# Altium PCB PCB.PcbDoc
Units mm, origin at the board's own origin, x right, y up, seen from the top; angles counter-clockwise.
Board outline 35.91 x 21.8 mm, 2 copper layers (Top Layer, Bottom Layer), stack 1.57 mm thick; 37 components, 16 nets, 94 pads, 88 vias.
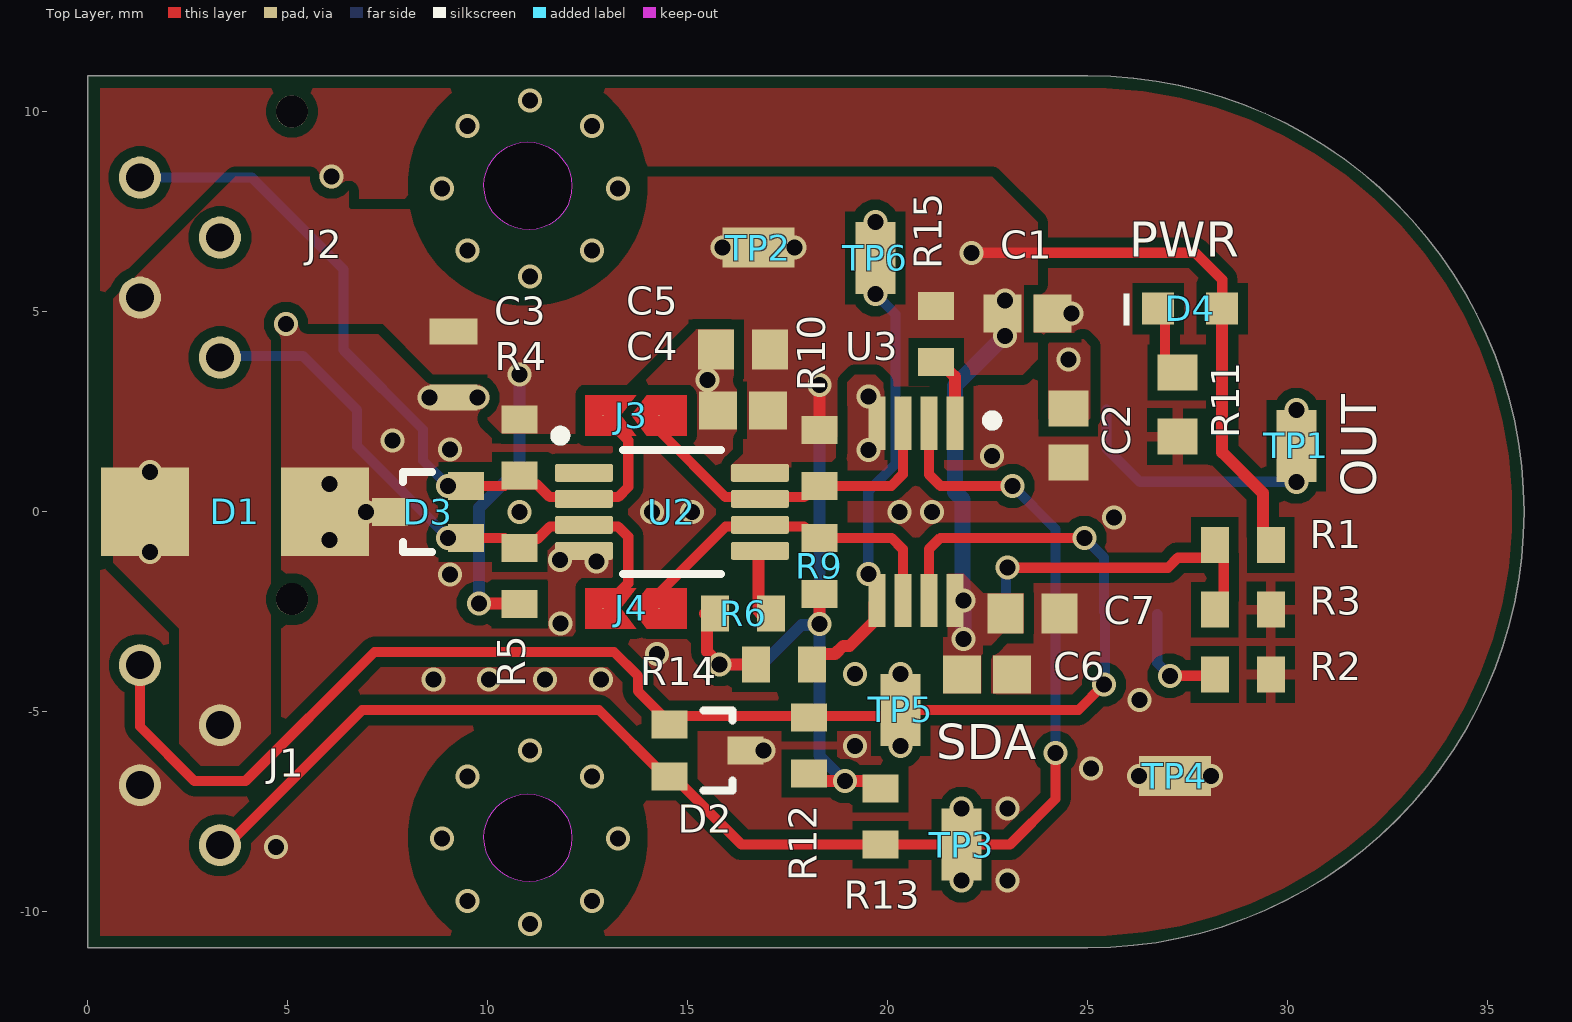
[diagram p0: Top Layer view]
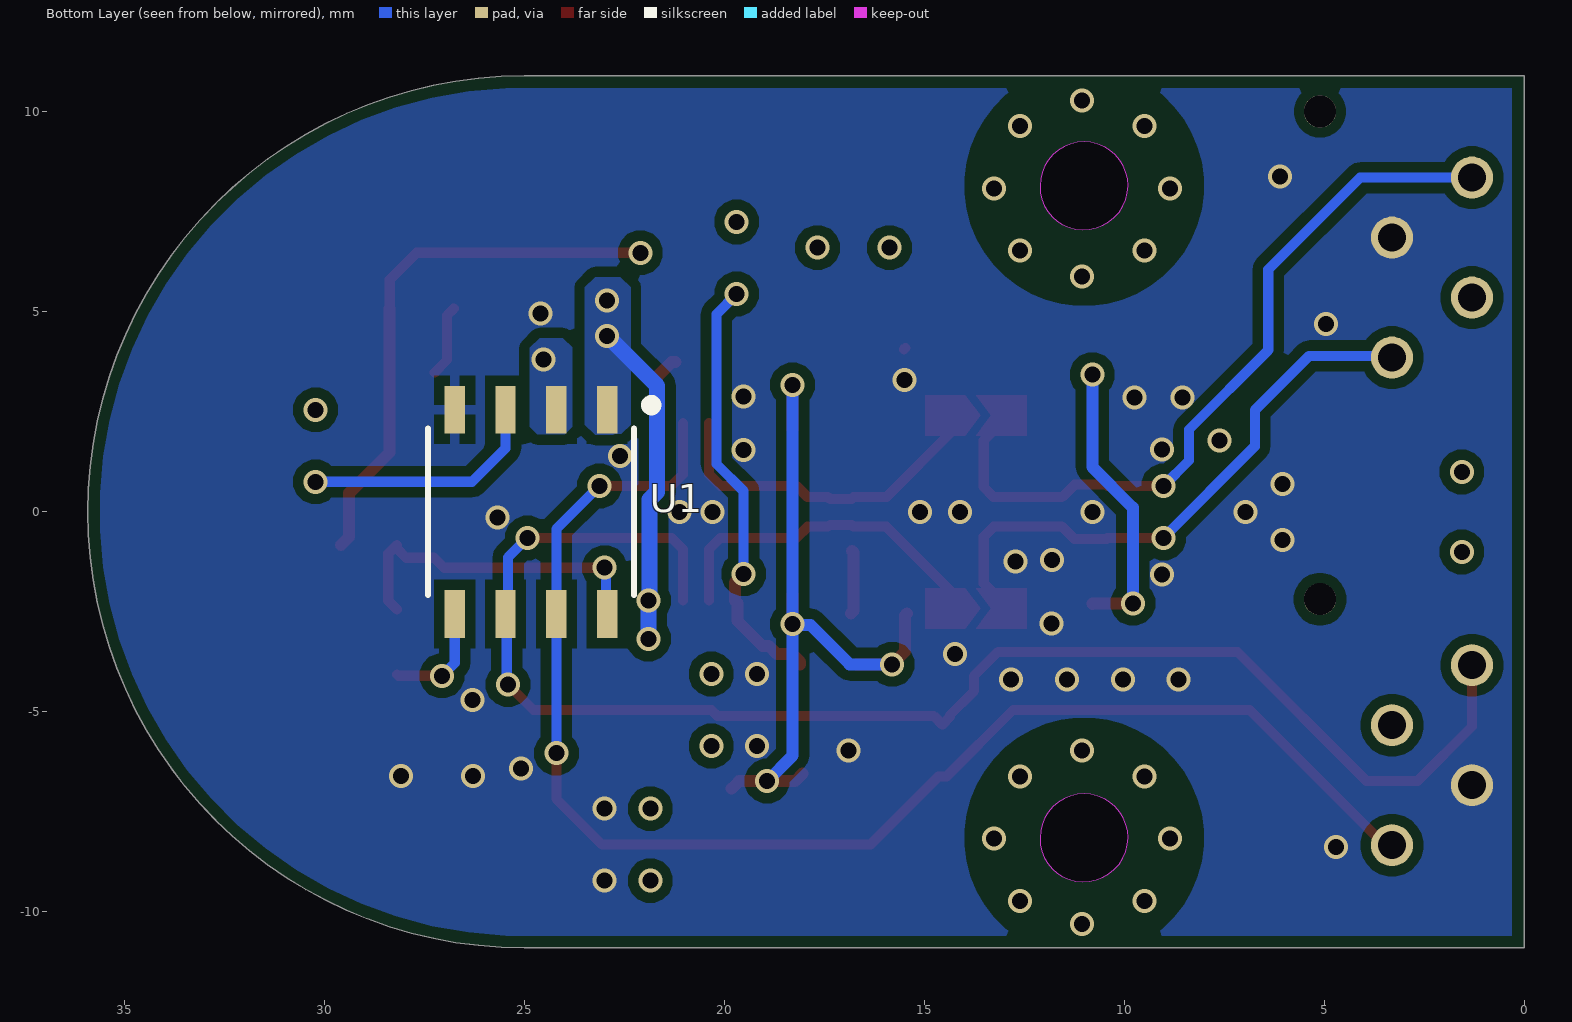
[diagram p1: Bottom Layer view, seen from below]
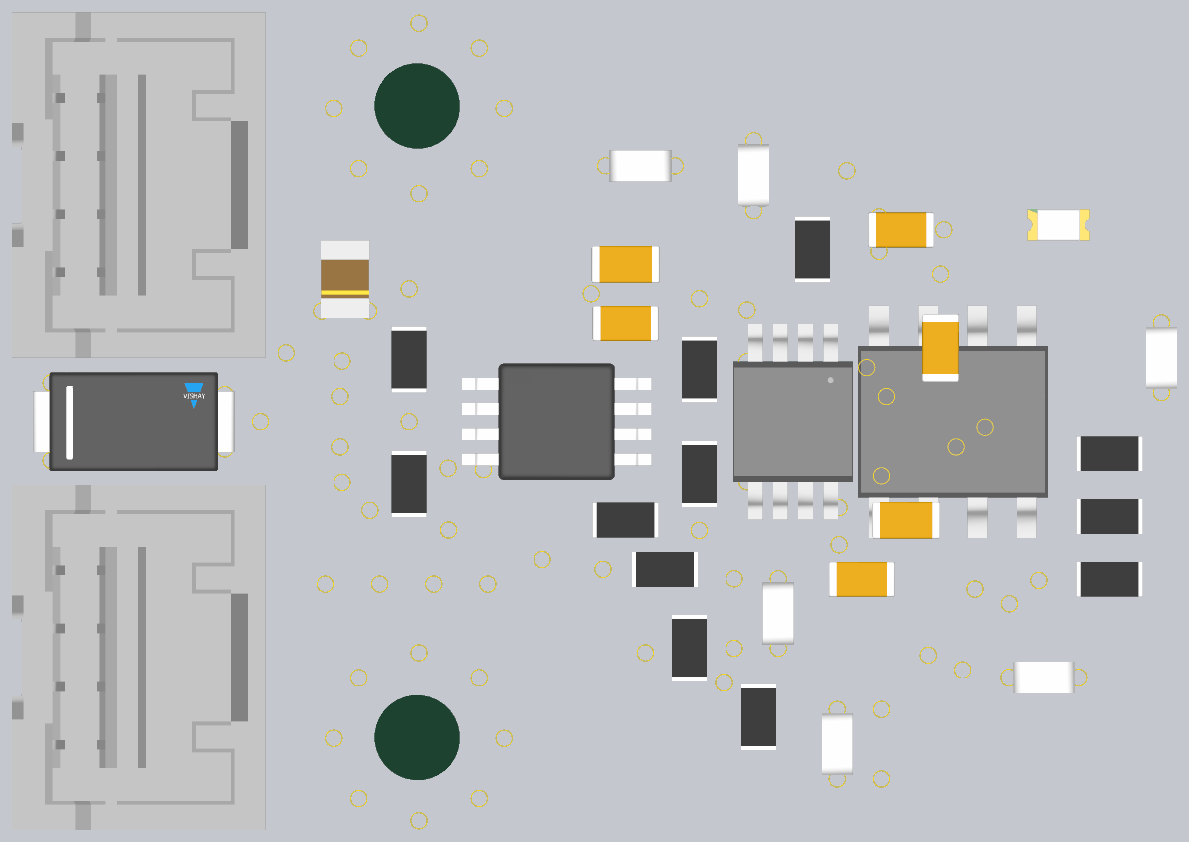
[diagram p2: 3D render of the assembled board from above, using the file's embedded part models]

## Layer stack, top to bottom
Top Solder: solder mask 0.01, Solder Resist, Dk 3.5
Top Layer: signal copper 0.035
Dielectric 1: dielectric 1.5, FR-4, Dk 4.8
Bottom Layer: signal copper 0.035
Bottom Solder: solder mask 0.01, Solder Resist, Dk 3.5

## Board outline
25,10.9 0,10.9 0,-10.9 25,-10.9 ccw(c25.005,0)
cut-out: 11.041,-9.249 cw(c11.02,-8.129) 9.9,-8.15 cw(c11,-8.15) 11,-7.05 cw(c11,-8.15) 12.1,-8.15 cw(c11.021,-8.17)
cut-out: 11.041,7.051 cw(c11.02,8.171) 9.9,8.15 cw(c11,8.15) 11,9.25 cw(c11,8.15) 12.1,8.15 cw(c11.021,8.13)

## Design rules (kind name [scope] priority, off if disabled: settings)
AssemblyTestPointUsage [All] p1: valid=2
BoardOutlineClearance [All] p1: gap=0.3 ignorepadtopadclearanceinfootprint=FALSE
Clearance [All] p1: gap=0.254 ignorepadtopadclearanceinfootprint=TRUE except(0: Arc-Hole Track-Hole SMDPad-Hole THPad-Hole Via-Hole Fill-Hole Poly-Hole Region-Hole Text-Hole)
DiffPairsRouting [InDifferentialPairClass('All Differential Pairs')] p1: maxlimit=0.254 minlimit=0.254 mostfreqgap=0.254 toplayer_minwidth=0.381 toplayer_maxwidth=0.381 toplayer_prefwidth=0.381 bottomlayer_minwidth=0.381 bottomlayer_maxwidth=0.381 bottomlayer_prefwidth=0.381 maxuncoupledlength=12.7
FabricationTestPointUsage [All] p1: valid=2 allowmultiple=FALSE
HoleSize [All] p1: absolutevalues=TRUE maxlimit=6.3 minlimit=0.025 maxpercent=80.000 minpercent=20.000
MinimumSolderMaskSliver [All] p1: minsoldermaskwidth=0.1
NetAntennae [All] p1 off: netantennaetolerance=1
PolygonConnect Vias [IsVia] p1: connectstyle=Direct reliefconductorwidth=0.254 reliefentries=4 polygonreliefangle="90 Angle" airgapwidth=0.254
PolygonConnect DirectClass [InPadClass('Direct')] p2: connectstyle=Direct reliefconductorwidth=0.254 reliefentries=4 polygonreliefangle="90 Angle" airgapwidth=0.254
PolygonConnect [All] p3: connectstyle=Relief reliefconductorwidth=0.254 reliefentries=4 polygonreliefangle="90 Angle" airgapwidth=0.254
RoutingVias [All] p1: holewidth=0.4 width=0.6 viastyle="Through Hole" minholewidth=0.3 minwidth=0.5 maxholewidth=1 maxwidth=2
SolderMaskExpansion [All] p1: expansion=0.102 istentingtop=FALSE
UnRoutedNet [All] p1: checkbadconnections=TRUE
Width [All] p1: maxlimit=1 minlimit=0.254 preferedwidth=0.254
23 further rules are at their usual default settings.

## Classes and differential pairs
pad class Direct: C1-1 C1-2 C2-1 C2-2 C3-1 C3-2 C4-1 C4-2 C5-1 C5-2 C6-1 C6-2 C7-1 C7-2 D1-1 D1-2 D2-2 D2-3 D3-1 D3-3 D4-2 J1-2 J1-3 J2-2 J2-3 R4-2 R10-2 R15-1 TP2-1 TP4-1 U1-1 U1-2 U2-1 U2-4 U2-8 U3-4 U3-8
component class "Bus Extender": C4 C5 C6 C7 J3 J4 R4 R5 R6 R9 R10 R12 R13 R14 R15 TP6 U2 U3
component class Encoder: C1 C2 R1 R2 R3 TP1 U1
component class Connectors: C3 D1 D2 D3 D4 J1 R11 TP2 TP3 TP4 TP5

## Components (designator, comment, footprint, x,y, rotation, side; value= is the part's Value field where it differs from the comment)
C1 "Capacitor 100 nF +/-10% 50 V 0603" CAPC1608X90X40NL10T20 23.495,4.953 r180 top value=100nF
C2 "Capacitor 1uF +/- 10% 16V 0603" CAPC1608X90X35NL15T15 24.511,1.905 r90 top value=1µF
C3 "CAP CER 10UF 16V X5R 0805" "CAP CER 10UF 16V X5R 0805-Footprint-1" 9.144,3.683 r90 top value=10µF
C4 "Capacitor 100 nF +/-10% 50 V 0603" CAPC1608X90X40NL10T20 16.383,2.54 r0 top value=100nF
C5 "Capacitor 1uF +/- 10% 16V 0603" CAPC1608X90X35NL15T15 16.383,4.064 r0 top value=1µF
C6 "Capacitor 100 nF +/-10% 50 V 0603" CAPC1608X90X40NL10T20 22.479,-4.064 r180 top value=100nF
C7 "Capacitor 1uF +/- 10% 16V 0603" CAPC1608X90X35NL15T15 23.622,-2.54 r180 top value=1µF
D1 "BZG05C5V6-M3-08" FP-S8-V-3848_01-003-MFG 3.683,0 r0 top
D2 "DF3A6.8FUT1G" ONSC-SC-70-3-419-04_V 15.494,-5.969 r0 top
D3 "DF3A6.8FUT1G" ONSC-SC-70-3-419-04_V 8.509,0 r180 top
D4 "150060RS75000" WL-SMCW_0603_150060xx75000 27.559,5.08 r0 top
J1 "5031590400" 5031590400-Footprint-1 3.302,-5.334 r270 top
J2 "5031590400" 5031590400-Footprint-1 3.302,6.858 r270 top
J3 "Solder jumper" "New footprint 1" 13.589,2.413 r180 top
J4 "Solder jumper" "New footprint 1" 13.589,-2.413 r180 top
R1 "Resistor 10k +/-1% 0603 100 mW" RESC1608X55X25NL10T15#1 28.874,-0.826 r0 top value=10k
R2 "Resistor 10k +/-1% 0603 100 mW" RESC1608X55X25NL10T15#1 28.874,-4.064 r0 top value=10k
R3 "Resistor 10k +/-1% 0603 100 mW" RESC1608X55X25NL10T15#1 28.874,-2.445 r180 top value=10k
R4 "Resistor 10k +/-1% 0603 100 mW" RESC1608X55X25NL10T15#1 10.795,1.604 r90 top value=10k
R5 "Resistor 10k +/-1% 0603 100 mW" RESC1608X55X25NL10T15#1 10.795,-1.604 r270 top value=10k
R6 "Resistor 10k +/-1% 0603 100 mW" RESC1608X55X25NL10T15#1 16.383,-2.54 r180 top value=10k
R9 "Resistor 10k +/-1% 0603 100 mW" RESC1608X55X25NL10T15#2 18.288,-1.35 r270 top value=10k
R10 "Resistor 10k +/-1% 0603 100 mW" RESC1608X55X25NL10T15#2 18.288,1.35 r90 top value=10k
R11 "RC0603JR-07180RL" RESC0603(1608)_N 27.241,2.681 r90 top value=180
R12 "Resistor 10k +/-1% 0603 100 mW" RESC1608X55X25NL10T15#1 18.034,-5.842 r270 top value=10k
R13 "Resistor 10k +/-1% 0603 100 mW" RESC1608X55X25NL10T15#1 19.812,-7.62 r90 top value=10k
R14 "Resistor 10k +/-1% 0603 100 mW" RESC1608X55X25NL10T15#1 17.399,-3.81 r180 top value=10k
R15 "Resistor 10k +/-1% 0603 100 mW" RESC1608X55X25NL10T15#1 21.209,4.445 r270 top value=10k
TP1 "RCUCTE" FP-S2761-46R-MFG 30.211,1.651 r270 top
TP2 "RCUCTE" FP-S2761-46R-MFG 16.764,6.604 r180 top
TP3 "RCUCTE" FP-S2761-46R-MFG 21.844,-8.32 r270 top
TP4 "RCUCTE" FP-S2761-46R-MFG 27.178,-6.604 r0 top
TP5 "RCUCTE" FP-S2761-46R-MFG 20.32,-4.953 r90 top
TP6 "RCUCTE" FP-S2761-46R-MFG 19.685,6.35 r270 top
U1 "AS5600L-ASOM" AS5600L-ASOM-Footprint-1 25,0 r270 bottom locked
U2 "PCA9515BDGKR" DGK0008A_L 14.603,0 r0 top
U3 "TCA4307DGKR" TCA4307DGKR-Footprint-1 20.701,0 r270 top

## Footprints (in the part's own frame and the unit in brackets; to place one, negate y for a bottom-side part, rotate by r counter-clockwise, add the part's x,y. Pads: shape width x height; smd on the part's side, far side on the other; paste and mask are expansions set on the pad)
5031590400-Footprint-1 [mm]
  round 1.05 / inner round 1.524 / far side round 1.05 hole 0.7 paste-2539.97 mask+0.076: 1(-1.5,-2) 2(0,0) 3(1.5,-2) 4(3,0)
  round 0.8 / inner round 1.524 / far side round 0.8 hole 0.8 unplated paste-2539.97 mask+0.076: 5(-3.15,1.8)
  body extent -3.7,-2.76 5.2,3.79, height 7.96
AS5600L-ASOM-Footprint-1 [mil] "AS5600L-ASOM-Footprint"
  rect 47.11x20 smd paste+0 mask+0: 1(-100.55,81.77) 2(-100.55,31.77) 3(-100.55,-18.23) 4(-100.55,-68.23) 5(100.56,-68.23) 6(100.56,-18.23) 7(100.56,31.77) 8(100.56,81.77)
  silkscreen extent -110,-95 82,130, body extent -118,-90 118,103, height 69
"CAP CER 10UF 16V X5R 0805-Footprint-1" [mm]
  rect 0.652x1.199 smd paste+0 mask+0: 1(-0.826,0) 2(0.826,0)
  body extent -1,-0.63 1,0.63, height 1.35
CAPC1608X90X35NL15T15 [mm] "Chip Capacitor, 2-Leads, Body 1.75x0.95mm, IPC Medium Density"
  rect 0.9x1 smd: 1(-0.675,0) 2(0.675,0)
  body extent -0.87,-0.48 0.87,0.48, height 0.9
CAPC1608X90X40NL10T20 [mm] "Chip Capacitor, 2-Leads, Body 1.70x0.90mm, IPC Medium Density"
  rect 0.95x0.95 smd mask+0: 1(-0.625,0) 2(0.625,0)
  body extent -0.85,-0.45 0.85,0.45, height 0.9
DGK0008A_L [mm] "TSOP, 8-Leads, Body 3.1x3.1mm, Pitch 0.65mm, IPC High Density"
  rrect22% 1.45x0.45 smd mask+0.11: 1(-2.2,0.975) 2(-2.2,0.325) 3(-2.2,-0.325) 4(-2.2,-0.975) 5(2.2,-0.975) 6(2.2,-0.325) 7(2.2,0.325) 8(2.2,0.975)
  silkscreen extent -2.89,-1.55 1.22,2, body extent -2.45,-1.5 2.45,1.5, height 0.94
FP-S8-V-3848_01-003-MFG [mm]
  rect 2.2x2.21 smd paste+0 mask+0: 1(-2.25,0) 2(2.25,0)
  body extent -2.6,-1.28 2.6,1.28, height 2.3
FP-S2761-46R-MFG [mm]
  rect 1.8x1 smd paste+0 mask+0: 1(0,0)
  body extent -0.8,-0.4 0.8,0.4, height 1.28
"New footprint 1" [mil]
  round 1 smd mask+0: 1(-27.19,0) 2(27.81,0)
  Top Layer region: -4.69,-20 10.31,0 -4.69,20 45.31,20 45.31,-20
  Top Layer region: -54.37,-20 -54.37,20 -15,20 0,0 -15,-20
ONSC-SC-70-3-419-04_V [mm] "SOT23, 3-Leads, Body 2x1.25mm, Pitch 0.65mm"
  rect 0.9x0.7 smd: 1(-0.95,0.65) 2(-0.95,-0.65) 3(0.95,0)
  silkscreen extent -0.1,-1 0.63,1, body extent -0.63,-1 0.63,1, height 1
RESC0603(1608)_N [mm] "Chip Resistor, Body 1.6x0.8mm, IPC Medium Density"
  rect 0.9x1 smd: 1(-0.8,0) 2(0.8,0)
  body extent -0.85,-0.47 0.85,0.47, height 0.6
RESC1608X55X25NL10T15#1 [mm] "Chip Resistor, 2-Leads, Body 1.70x0.90mm, IPC Medium Density"
  rect 0.7x0.9 smd: 1(-0.7,0) 2(0.7,0)
  body extent -0.85,-0.45 0.85,0.45, height 0.55
RESC1608X55X25NL10T15#2 [mm] "Chip Resistor, 2-Leads, Body 1.70x0.90mm, IPC Medium Density"
  rect 0.7x0.9 smd mask+0: 1(-0.7,0) 2(0.7,0)
  body extent -0.85,-0.45 0.85,0.45, height 0.55
TCA4307DGKR-Footprint-1 [mil]
  rect 52.5x17 smd paste+0 mask+0: 1(-87.25,38.39) 2(-87.25,12.8) 3(-87.25,-12.79) 4(-87.25,-38.39) 5(87.25,-38.38) 6(87.25,-12.79) 7(87.25,12.8) 8(87.25,38.39)
  silkscreen extent -95,70 -85,80, body extent -99,-61 99,61, height 43
WL-SMCW_0603_150060xx75000 [mm] "SMD Mono-color Chip LED, body 1.6x0.8mm"
  rect 0.8x0.8 smd: 1(-0.8,0) 2(0.8,0)
  silkscreen extent -1.67,-0.42 -1.52,0.38, body extent -0.8,-0.4 0.8,0.4, height 0.7

## Part data
C1 C4 C6: library part CMP-001-00017-8, "Chip Capacitor, 100 nF, +/- 10%, 50 V, 0603 (1608 Metric)", Capacitor Type=Ceramic, Case/Package=0603, Max Operating Temperature=125°C, Min Operating Temperature=-55°C, Tolerance=10%, Voltage Rating=50V, Mounting Technology=SM, Pins=2, RoHS Compliant=True
C2 C5 C7: library part CMP-001-00004-8, "Chip Capacitor, 1 uF, +/- 10%, 16 V, 0603 (1608 Metric)", Capacitor Type=Ceramic, Case/Package=0603, Max Operating Temperature=125°C, Min Operating Temperature=-55°C, Tolerance=10%, Voltage Rating=16V, Mounting Technology=SM, Pins=2, RoHS Compliant=True
C3: library part CMP-001-00084-6, "Ceramic Capacitor, Multilayer, Ceramic, 16V, 10% +Tol, 10% -Tol, X5R, 15% TC, 10uF, Surface Mount, 0805", Capacitor Type=Ceramic, Case/Package=0805, Max Operating Temperature=85°C, Min Operating Temperature=-55°C, Voltage Rating=16V, Mounting Technology="Surface Mount", Pins=2, RoHS Compliant=Yes
D1: library part CMP-004-00042-1, "Zener Diode, 5.6V V(Z), 7.14%, 1.25W, Silicon, Unidirectional, DO-214AC", Max Operating Temperature=150°C, Max Power Dissipation=1.25W, Package Body Material=Plastic, Package Shape=Rectangular, Package Style="SMALL OUTLINEMeter", Peak Reflow Temperature (Cel)=260°C, Reference Voltage-Nom=5.6V, Test Current=45mA, Time @ Peak Reflow Temperature-Max (s)=30s, Voltage Tol-Max=7.14%, Additional Feature="HIGH RELIABILITY", Diode Element Material=SILICON, Diode Type=ZENER, JEDEC-95 Code=DO-214AC, JESD-30 Code=R-PDSO-C2, JESD-609 Code=e3, Moisture Sensitivity Level=1, Number of Elements=1, Pins=2, Polarity=Unidirectional, Reach SVHC Compliant=No, RoHS Compliant=Yes, Surface Mount=Yes, Technology=ZENER, Terminal Finish=Tin, Terminal Form="C BEND", Terminal Position=DUAL
D2 D3: library part CMP-004-00039-1, "Trans Voltage Suppressor Diode, 150W, Unidirectional, 2 Element, Silicon", Max Breakdown Voltage=7.2V, Max Operating Temperature=150°C, Max Power Dissipation=200mW, Min Breakdown Voltage=6.4V, Min Operating Temperature=-55°C, Non-rep Peak Rev Power Dis-Max=150W, Package Body Material=Plastic, Package Shape=Rectangular, Package Style="SMALL OUTLINEMeter", Peak Reflow Temperature (Cel)=260°C, Reference Voltage-Nom=6.8V, Test Current=5mA, Time @ Peak Reflow Temperature-Max (s)=40s, Voltage Tol-Max=5.9%, Diode Element Material=SILICON, Diode Type="TRANS VOLTAGE SUPPRESSOR", Dynamic Impedance-Max=50R, JESD-30 Code=R-PDSO-G3, JESD-609 Code=e3, Moisture Sensitivity Level=1, Number of Elements=2, Pins=3, Polarity=Unidirectional, Qualification Status="Not Qualified", Reach SVHC Compliant=Yes, RoHS Compliant=Yes, Surface Mount=Yes, Technology=ZENER, Terminal Finish=Tin, Terminal Form="Gull Wing", Terminal Position=DUAL
D4: library part CMP-007-00036-1, "Single Color LED, Red, Water Clear, 1.1mm", Forward Current=30mA, Max Operating Temperature=85°C, Min Operating Temperature=-40°C, Mounting Technology="Surface Mount", Pins=2, RoHS Compliant=Yes
J1 J2: library part CMP-002-00073-2, "Board Connector, 4 Contact(s), 1 Row(s), Female, Straight, 0.059 inch Pitch, Solder Terminal, Locking, Beige Insulator, Receptacle", Max Operating Temperature=85°C, Min Operating Temperature=-25°C, Connector Type="BOARD CONNECTOR", Mounting Technology=Board, RoHS Compliant=Yes
J3 J4: library part CMP-00030-00001-3
R1 R2 R3 R4 R5 R6 R9 R10 R12 R13 R14 R15: library part CMP-009-00017-7, "Chip Resistor, 10 KOhm, +/- 1%, 01 W, -55 to 155 degC, 0603 (1608 Metric)", Case/Package=0603, Max Operating Temperature=155°C, Min Operating Temperature=-55°C, Power=100mW, Tolerance=1%, Voltage Rating=50V, Mounting Technology=SM, Pins=2, RoHS Compliant=True
R11: library part CMP-009-00178-1, "Fixed Resistor, Metal Glaze/thick Film, 0.1W, 180ohm, 75V, 5% +/-Tol, 100ppm/Cel, Surface Mount, 0603", Case/Package=0603, Max Operating Temperature=155°C, Min Operating Temperature=-55°C, Power=100mW, Tolerance=5%, Mounting Technology="Surface Mount", Pins=2, RoHS Compliant=Yes
TP1 TP2 TP3 TP4 TP5 TP6: library part CMP-002-00072-5, "Test point", Case/Package=0603, Max Operating Temperature=125°C, Min Operating Temperature=-55°C, Connector Type="Interconnection Device", Mounting Technology="Surface Mount", Pins=2, RoHS Compliant=Yes
U1: library part CMP-010-00024-5, "AS5600L Series 12-Bit Programmable On-Axis Magnetic Rotary Position Sensor", Case/Package=SOIC-8, Max Operating Temperature=125°C, Max Supply Voltage=5V, Min Operating Temperature=-40°C, Min Supply Voltage=3.3V, Mounting Technology=SMD, Pins=8, Sensor Type="Magnetic Rotary Position Sensor"
U2: library part CMP-015-00014-2, "Interface Circuit, BICMOS, PDSO8", Case/Package=TSSOP, Max Operating Temperature=85°C, Max Supply Voltage=3.6V, Min Operating Temperature=-40°C, Min Supply Voltage=2.3V, Nominal Supply Voltage=2.5V, Package Body Material=Plastic, Package Equivalence Code=TSSOP8,.19, Package Shape=Square, Package Style="SMALL OUTLINE, THIN PROFILE, SHRINK PITCHMeter", Peak Reflow Temperature (Cel)=260°C, Power Supplies=2.5/3.3V, Temperature Grade=INDUSTRIAL, Channels=1, Height - Seated (Max)=1.1mm, Interface IC Type="INTERFACE CIRCUIT", JESD-30 Code=S-PDSO-G8, JESD-609 Code=e4, Length=3mm, Moisture Sensitivity Level=1, Pins=8, Qualification Status="Not Qualified", Reach SVHC Compliant=Yes, RoHS Compliant=Yes, Surface Mount=Yes, Technology=BICMOS, Terminal Finish=Nickel, Terminal Form="Gull Wing", Terminal Pitch=0.65mm, Terminal Position=DUAL, Width=3mm
U3: library part CMP-015-00015-2, "Interface Circuit, PDSO8"

## Via types
v1: diameter 0.6, hole 0.4, Top Layer to Bottom Layer, tented both sides, 88 vias

## Nets (pads, with @x,y where several pads share a name; then routed paths per layer and width w, separated by ;. In a path a pad name is that pad's centre, name@x,y a point inside that pad or via, vN(x,y) a via of type N, cw(c..) or ccw(c..) an arc to the next point about the centre after c; other vN are vias at no path point)
+5V0: C1.2 C3.2 C4.2 C5.2 C6.2 C7.2 D1.1 D4.2 J1.2 J2.3 R1.2 R4.2 R5.2 R6.2 R9.2 R10.2 R12.2 R13.2 R14.2 R15.1 TP2.1 U1.1 U2.8 U3.8 | length 48.2
  Top Layer w0.254: v1(22.094,6.477) 27.686,6.477 28.359,5.804 D4.2
  Top Layer w0.3: v1(9.779,-2.286) 9.788,-2.295 10.786,-2.295 R5.2 ; R6.2@15.429,-2.54 15.482,-2.593 15.482,-3.495 v1(15.797,-3.81) 16.549,-3.81 R14.2 ; R12.2 18.223,-6.731 v1(18.923,-6.731) 19.623,-6.731 R13.2 ; v1(18.288,-2.806) R9.2 ; R10.2 v1(18.288,3.175) ; D4.2 28.359,1.486 29.374,0.471 29.374,-0.626 R1.2
  Bottom Layer w0.3: v1@9.788,-2.295 v1(9.779,-2.286) 9.779,0.104 10.795,1.12 v1(10.795,3.429) ; v1(15.797,-3.81) 16.859,-3.81 17.845,-2.824 18.27,-2.824 v1(18.288,-2.806) ; v1(18.288,3.175) v1(18.288,-2.806) ; v1(18.923,-6.731) 18.288,-6.096 v1(18.288,-2.806)
  Bottom Layer w0.4: v1(21.892,-3.175) v1(21.892,-2.216) 21.892,-2.162 21.864,-2.134 21.864,0.312 21.676,0.5 21.676,3.151 v1(22.923,4.398)
  other v1: 1.556,-1 1.556,1 22.923,5.287 15.864,6.604 17.664,6.604
GND: C1.1 C2.1 C3.1 C4.1 C5.1 C6.1 C7.1 D1.2 D2.3 D3.3 J1.3 J2.2 R2.2 R3.1 R11.1 TP4.1 U1.4 U2.4 U3.4 | length 0.2
  Top Layer w0.254: v1@14.09,-3.475 14.171,-3.556 v1(14.224,-3.556) ; C5.1@15.469,4.099 C5.1@15.504,4.064
  other v1: 22.987,-9.22 4.699,-8.382 22.987,-7.42 26.278,-6.604 28.078,-6.604 25.082,-6.413 16.894,-5.969 19.177,-5.853 26.289,-4.699 8.636,-4.191 10.033,-4.191 11.43,-4.191 12.827,-4.191 19.177,-4.053 11.811,-2.794 9.058,-1.565 12.714,-1.238 11.799,-1.2 6.037,-0.7 25.66,-0.142 6.959,0 10.795,0 14.103,0 15.103,0 20.292,0 21.11,0 6.037,0.7 22.606,1.397 19.51,1.549 9.058,1.565 7.62,1.778 8.544,2.857 9.744,2.857 19.51,2.883 15.494,3.302 4.953,4.699 24.595,4.953 6.096,8.382
NetC2_2: C2.2 U1.2
  other v1: 24.511,3.81
NetD2_1: D2.1 J1.1 R12.1 TP5.1 U1.6 U3.7 | length 38.2
  Top Layer w0.254: J1.1 1.302,-5.366 2.667,-6.731 3.937,-6.731 7.166,-3.502 13.154,-3.502 13.753,-4.101 13.753,-4.482 14.351,-5.08 14.351,-5.126 D2.1 14.762,-5.101 20.172,-5.101 TP5.1 24.765,-4.953 v1(25.4,-4.318) ; U3.7 21.026,-0.937 21.313,-0.65 v1(24.913,-0.65)
  Bottom Layer w0.254: v1(24.913,-0.65) 25.4,-1.137 25.4,-2.491 U1.6 25.432,-2.586 25.432,-4.286 v1(25.4,-4.318)
  other v1: 20.32,-5.853 20.32,-4.053
NetD2_2: D2.2 J1.4 R13.1 TP3.1 U1.7 U3.2 | length 35.9
  Top Layer w0.254: J1.4 3.477,-8.334 6.858,-4.953 12.778,-4.953 14.444,-6.619 D2.2 14.644,-6.619 16.345,-8.32 R13.1 TP3.1 23.05,-8.32 24.193,-7.177 v1(24.193,-6.032) ; U3.2 21.026,0.937 21.313,0.65 v1(23.114,0.65)
  Bottom Layer w0.254: v1(23.114,0.65) 24.193,-0.429 U1.7 v1(24.193,-6.032)
  other v1: 21.844,-9.22 21.844,-7.42
NetD3_1: D3.1 J2.4 J4.2 R5.1 U2.3 | length 14.6
  Top Layer w0.254: v1(9.009,-0.65) D3.1 10.414,-0.65 10.445,-0.681 11.237,-0.681 11.549,-0.369 13.257,-0.369 13.509,-0.621 13.509,-1.786 J4.2
  Bottom Layer w0.254: J2.4@3.6,3.9 5.371,3.9 6.731,2.54 6.731,1.638 9.009,-0.64 v1(9.009,-0.65)
NetD3_2: D3.2 J2.1 J3.2 R4.1 U2.2 | length 19.3
  Top Layer w0.254: v1(9.009,0.65) 10.414,0.65 10.445,0.681 11.237,0.681 11.549,0.369 13.257,0.369 13.509,0.621 13.509,1.786 J3.2
  Bottom Layer w0.254: J2.1 4.096,8.358 6.394,6.06 6.394,4.044 8.379,2.059 8.379,1.849 8.377,1.847 8.377,1.282 v1(9.009,0.65)
NetD4_1: D4.1 R11.2 | length 1.8
  Top Layer w0.254: D4.1 26.926,4.913 26.926,3.796 R11.2
NetJ3_1: J3.1 R10.1 U2.7 U3.3 | length 8.7
  Top Layer w0.254: J3.1 14.279,2.032 15.942,0.369 16.759,0.369 U2.7 17.355,0.325 17.399,0.369 17.907,0.369 18.188,0.65 R10.1 20.089,0.65 20.376,0.937 U3.3
NetJ4_1: J4.1 R9.1 U2.6 U3.6 | length 8.7
  Top Layer w0.254: J4.1 14.279,-2.032 15.942,-0.369 16.759,-0.369 U2.6 17.355,-0.325 17.399,-0.369 17.907,-0.369 18.188,-0.65 20.089,-0.65 20.376,-0.937 U3.6
NetR1_1: R1.1 R3.2 U1.8 | length 8.5
  Top Layer w0.254: v1(22.987,-1.397) 27.003,-1.397 27.251,-1.149 27.951,-1.149 28.174,-0.926 R1.1 28.397,-1.049 28.397,-2.222 R3.2
  Bottom Layer w0.254: U1.8 22.955,-2.522 22.955,-1.429 v1(22.987,-1.397)
NetR2_1: R2.1 U1.5 | length 2.8
  Top Layer w0.254: v1(27.051,-4.097) 28.141,-4.097 R2.1
  Bottom Layer w0.254: U1.5 26.733,-3.779 v1(27.051,-4.097)
NetR6_1: R6.1 U2.5 | length 1.6
  Top Layer w0.3: U2.5 16.764,-1.014 16.764,-2.475 R6.1@16.829,-2.54
NetR14_1: R14.1 TP6.1 U3.5 | length 10.8
  Top Layer w0.3: R14.1 18.099,-3.755 18.299,-3.554 18.68,-3.554 18.885,-3.349 19.044,-3.349 19.66,-2.733 19.66,-2.282 U3.5 19.726,-1.765 v1(19.51,-1.549)
  Bottom Layer w0.254: v1(19.51,-1.549) 19.51,0.514 20.191,1.195 20.191,4.944 v1(19.685,5.45)
  other v1: 19.685,7.25
NetR15_2: R15.2 U3.1 | length 1.8
  Top Layer w0.3: R15.2 21.309,3.745 21.676,3.378 U3.1
OUT: TP1.1 U1.3 | length 6.1
  Bottom Layer w0.254: U1.3 25.463,1.588 26.3,0.751 v1(30.211,0.751)
  other v1: 30.211,2.551
pads on no net: J1.5 J2.5 U2.1
copper on no net:
  other v1: 11.049,-10.3 9.493,-9.725 12.605,-9.725 8.849,-8.169 13.249,-8.169 9.493,-6.613 12.605,-6.613 11.049,-5.969 11.049,5.887 9.493,6.531 12.605,6.531 8.849,8.087 13.249,8.087 9.493,9.643 12.605,9.643 11.049,10.287

## Polygon pours and split planes (outlines as drawn)
GND on Top Layer "GND_L01_P009" (solid, remove dead copper, pour order 9): 25,10.9 0,10.9 0,-10.9 25,-10.9 ccw(c25.005,0)
+5V0 on Top Layer "+5V0_L01_P008" (solid, remove dead copper, pour order 8): 17.528,1.115 17.528,0.8 17.479,0.75 16.128,0.75 16.078,0.8 16.078,1.151 16.383,1.456 16.383,4.535 16.092,4.826 15.113,4.826 12.241,1.954 10.345,1.954 9.124,3.175 8.89,3.175 7.366,4.699 4.953,4.699 4.572,4.318 4.572,-0.254 4.572,-6.096 4.318,-6.35 2.54,-6.35 2.286,-6.096 2.286,-2.921 0.635,-1.27 0.635,5.334 3.683,8.382 6.521,8.382 6.521,7.621 6.574,7.568 8.323,7.568 9.137,8.382 22.606,8.382 23.749,7.239 23.749,3.81 23.368,3.429 21.59,3.429 21.326,3.429 20.05,2.153 19.018,2.153 18.703,1.838 18.703,1.356 18.462,1.115
+5V0 on Top Layer "+5V0_L01_P007" (solid, pour order 7): 21.46,-1.549 21.379,-1.63 21.379,-4.539 22.329,-4.539 22.329,-3.589 22.878,-3.04 23.397,-3.04 23.397,-2.04 22.382,-2.04 21.892,-1.549
GND on Top Layer "GND_L01_P004" (solid, pour order 4): 11.495,-1.716 11.495,-0.983 11.885,-0.593 13.278,-0.593 13.278,-1.479 12.979,-1.778 11.557,-1.778
GND on Top Layer "GND_L01_P002" (solid, pour order 2): 19.177,3.429 19.685,3.429 19.883,3.231 19.883,1.341 19.685,1.143 19.195,1.143 18.988,1.35 18.988,3.24
NetC2_2 on Top Layer "NETC2_2_L01_P001" (solid, pour order 1): 24.008,2.338 24.008,4.196 24.13,4.318 24.892,4.318 25.065,4.145 25.065,2.334 24.883,2.153 24.193,2.153
GND on Bottom Layer "GND_L02_P005" (solid, remove dead copper, pour order 5): 25,10.9 0,10.9 0,-10.9 25,-10.9 ccw(c25.005,0)
NetC2_2 on Bottom Layer "NETC2_2_L02_P000" (solid, pour order 0): 23.799,2.127 23.799,4.114 24.028,4.343 24.613,4.343 24.856,4.1 24.856,2.123 24.674,1.941 23.984,1.941
+5V0 on Bottom Layer "+5V0_L02_P003" (solid, pour order 3): 23.48,2.182 23.48,5.611 23.226,5.865 22.591,5.865 22.337,5.611 22.337,2.182 22.591,1.928 23.226,1.928

## Other copper
Top Layer:
  pour cut-out: 11,5.15 cw(c11,8.15) 8,8.15 cw(c11,8.15) 11,11.15 cw(c11,8.15) 14,8.15 cw(c11,8.15)
  pour cut-out: 11,-11.15 cw(c11,-8.15) 8,-8.15 cw(c11,-8.15) 11,-5.15 cw(c11,-8.15) 14,-8.15 cw(c11,-8.15)
Bottom Layer:
  pour cut-out: 11,-11.15 cw(c11,-8.15) 8,-8.15 cw(c11,-8.15) 11,-5.15 cw(c11,-8.15) 14,-8.15 cw(c11,-8.15)
  pour cut-out: 11,5.15 cw(c11,8.15) 8,8.15 cw(c11,8.15) 11,11.15 cw(c11,8.15) 14,8.15 cw(c11,8.15)

## Silkscreen, mask and mechanical layers (free items; w line width, h text height)
Top Overlay:
  text "PWR" at 26.035,6.096 h1.5
  text "OUT" at 32.495,0.381 h1.5 r90
  text "SDA" at 21.209,-6.477 h1.5
Mechanical 1:
  circle w0.1: c11,-8.15 r1.1
  circle w0.1: c11,8.15 r1.1
  lines w0.1: 24.5,0 25.5,0 ; 25,-0.5 25,0.5
  lines w0.2: 24.995,-10.9 0,-10.9 0,10.9 25,10.9 ; 24.995,-10.9 ccw(c24.995,0) 24.995,10.9
Board:
  the board outline again, w0.2